# Altium PCB ESP_12F_CLOCK_MAXTRIX_V1.PcbDoc
Units mm, origin at the board's own origin, x right, y up, seen from the top; angles counter-clockwise.
Board outline 28 x 42 mm, 2 copper layers (Top Layer, Bottom Layer); 18 components, 22 nets, 94 pads, 6 vias.
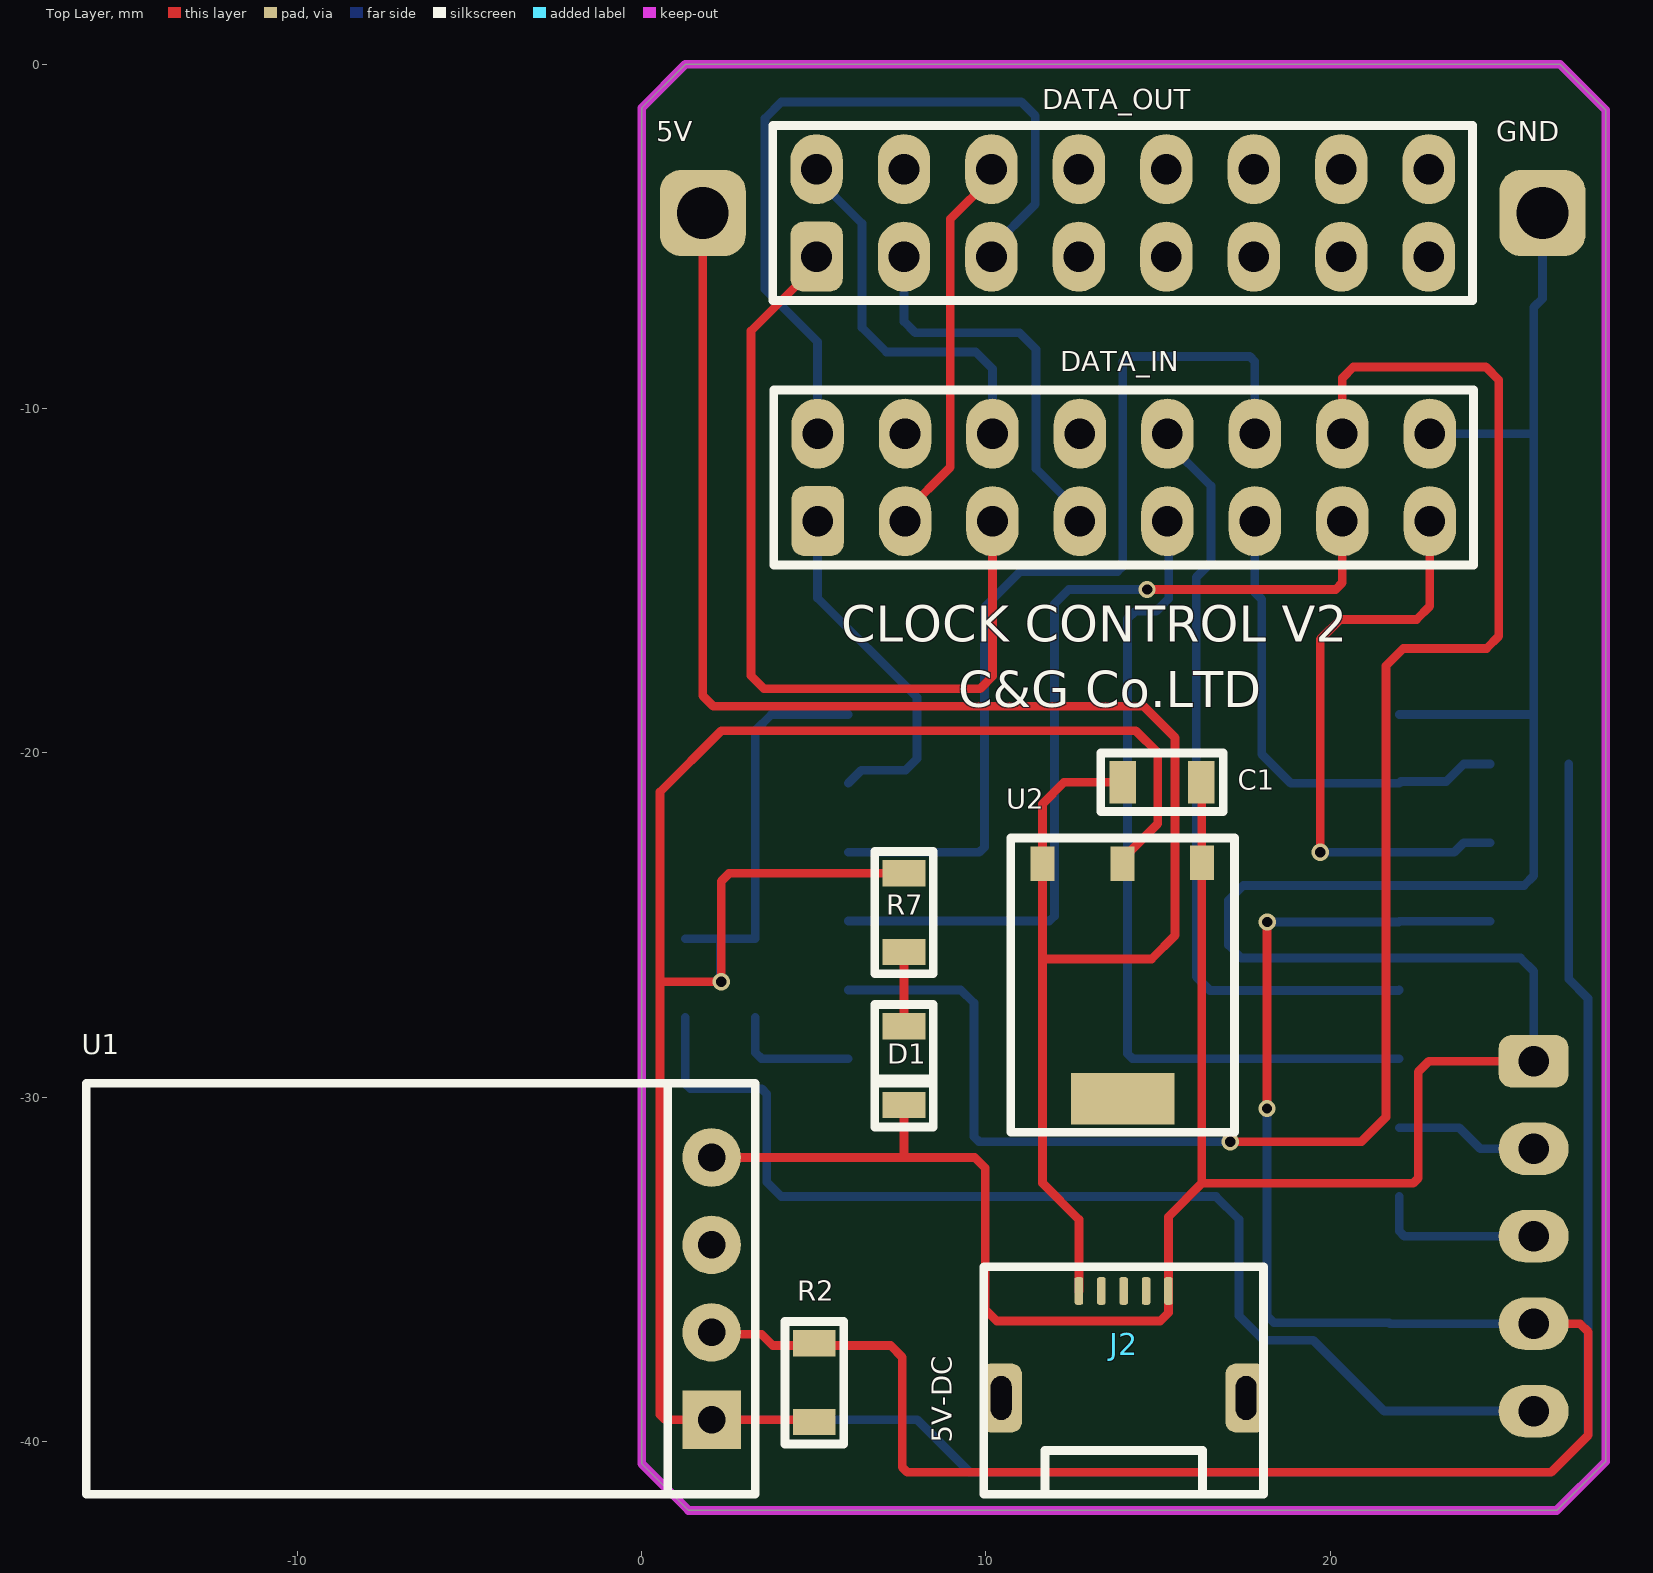
[diagram p0: Top Layer view]
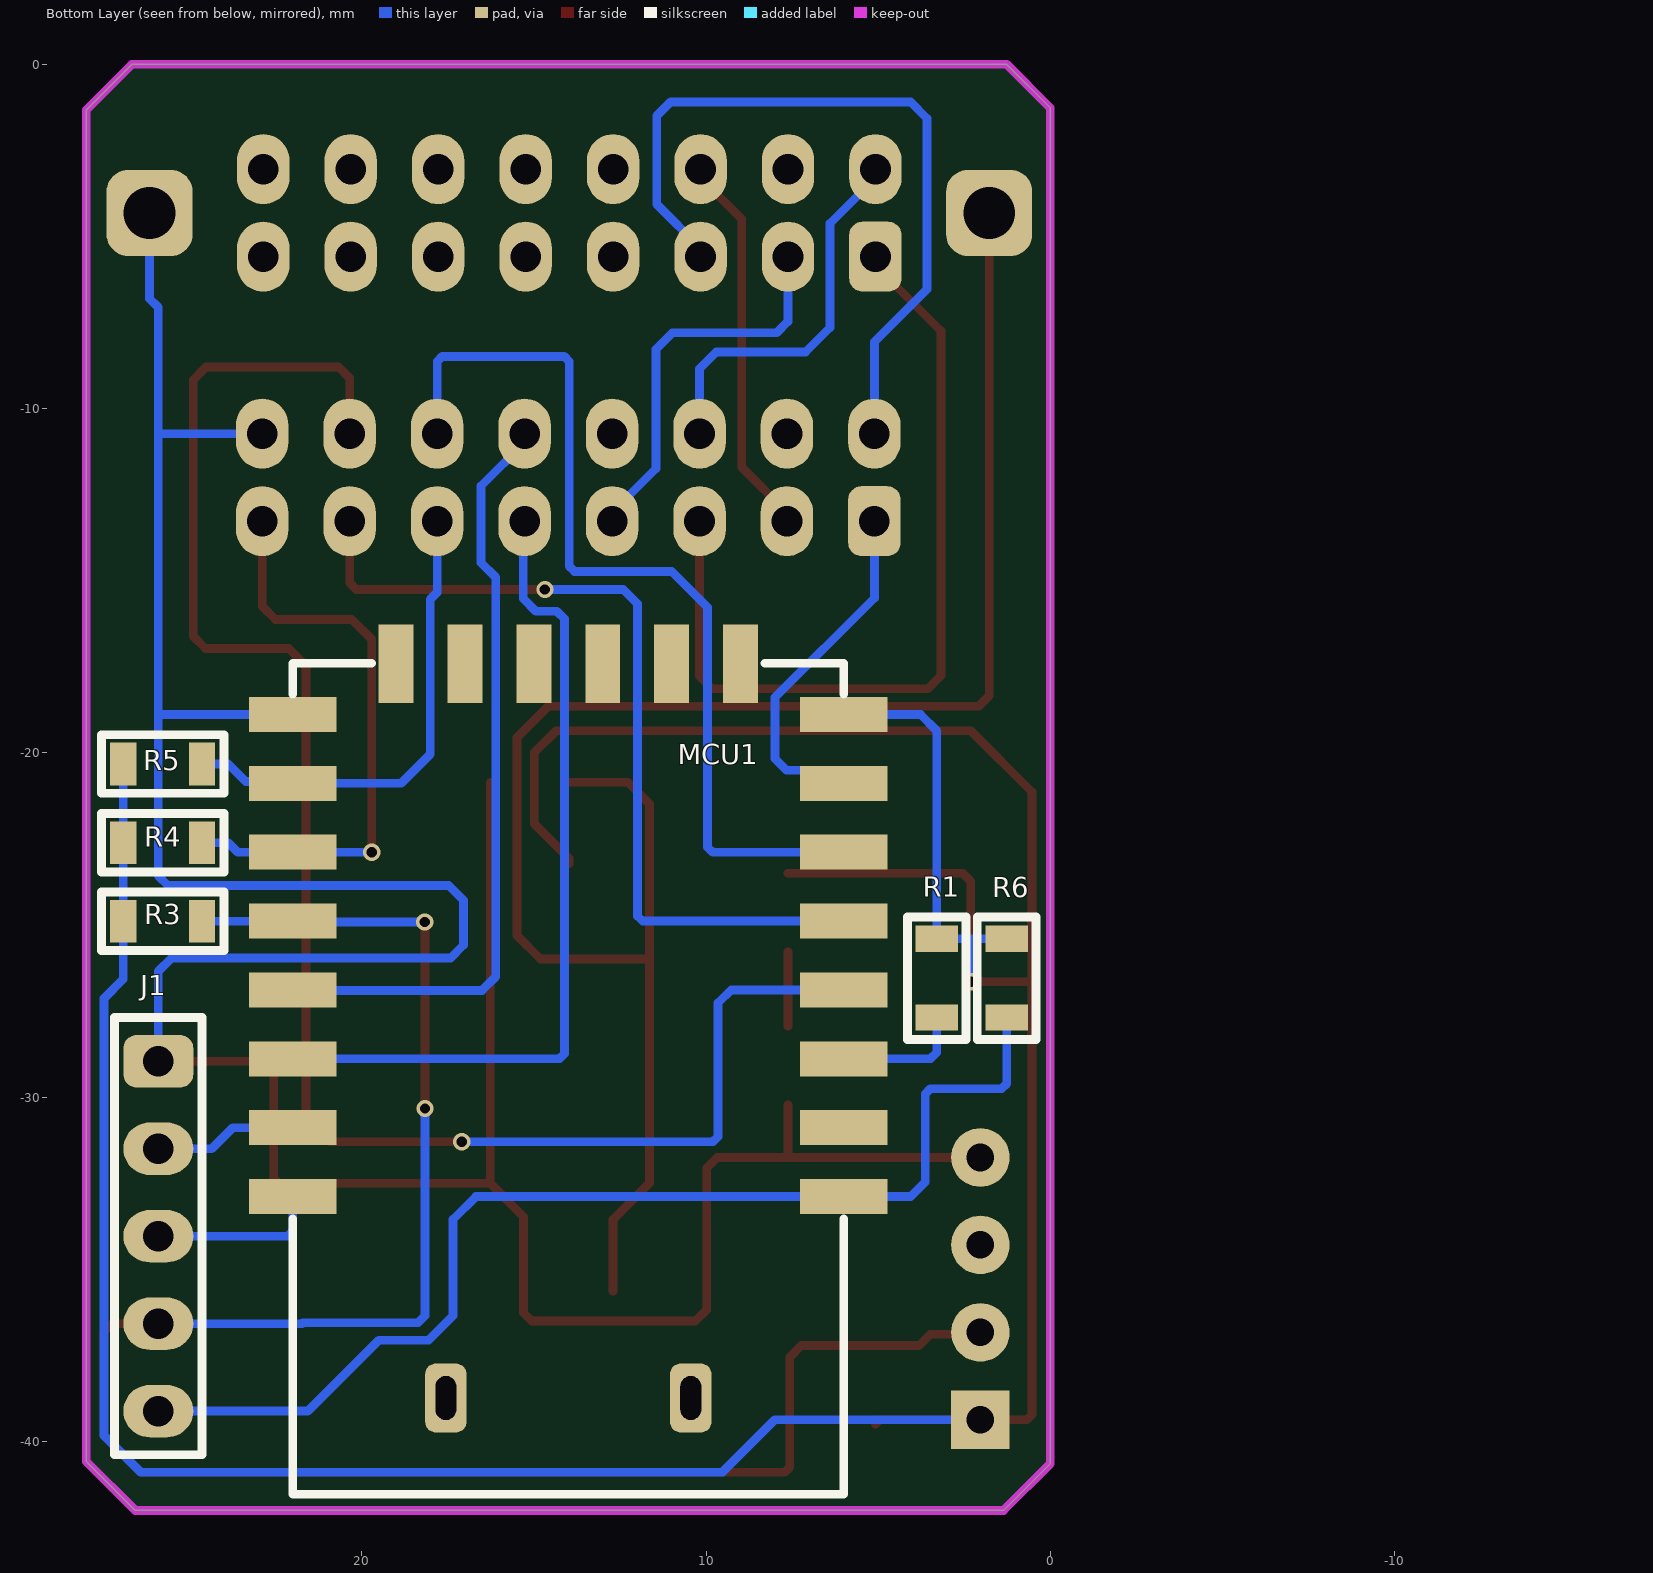
[diagram p1: Bottom Layer view, seen from below]

## Layer stack, top to bottom
Top Solder: solder mask 0.0102, Solder Resist, Dk 3.5
Top Layer: signal copper 0.0356
Dielectric 1: dielectric 0.32, FR-4, Dk 4.8
Bottom Layer: signal copper 0.0356
Bottom Solder: solder mask 0.0102, Solder Resist, Dk 3.5

## Board outline
0,-40.64 0,-1.27 1.27,0 26.67,0 28,-1.33 28,-40.58 26.58,-42 1.36,-42

## Design rules (kind name [scope] priority, off if disabled: settings)
Clearance [All] p1: gap=0.254 ignorepadtopadclearanceinfootprint=FALSE except(0: Arc-Hole Track-Hole SMDPad-Hole THPad-Hole Via-Hole Fill-Hole Poly-Hole Region-Hole Text-Hole)
PolygonConnect [All] p1: connectstyle=Relief reliefconductorwidth=0.254 reliefentries=4 polygonreliefangle="90 Angle" airgapwidth=0.254
RoutingVias [All] p1: holewidth=0.3 width=0.5 viastyle="Through Hole" minholewidth=0.3 minwidth=0.5 maxholewidth=0.3 maxwidth=0.5
SolderMaskExpansion [All] p1: expansion=0.102 istentingtop=FALSE
Width [All] p1: maxlimit=0.254 minlimit=0.254 preferedwidth=0.254
30 further rules are at their usual default settings.

## Components (designator, comment, footprint, x,y, rotation, side; value= is the part's Value field where it differs from the comment)
5V "SolderPoint" SolderPoint 1.778,-4.318 r0 top
C1 "103" C0805 15.113,-20.853 r180 top
D1 "LED0805" L0805RED 7.62,-29.083 r270 top
DATA_IN "DATA_IN" "Header 8x2 TH Pitch 2.54mm" 14,-12 r90 top
DATA_OUT "DATA_OUT" "Header 8x2 TH Pitch 2.54mm" 13.97,-4.318 r90 top
GND "SolderPoint" SolderPoint 26.162,-4.318 r0 top
J1 "PRGM" "Header 5x1 TH Pitch 2.54mm" 25.908,-34.036 r180 bottom
J2 "5V-DC" "Micro USB 01" 14,-38.862 r0 top
MCU1 "Wifi SoC ESP8266" ESP-12F 14,-25.146 r0 bottom
R1 "1K" R0805 3.302,-26.543 r270 bottom
R2 "10k" R0805 5.016,-38.291 r270 top
R3 "1K" R0805 25.781,-24.892 r0 bottom
R4 "1K" R0805 25.781,-22.606 r0 bottom
R5 "1K" R0805 25.781,-20.32 r0 bottom
R6 "1K" R0805 1.27,-26.543 r270 bottom
R7 "1K" R0805 7.62,-24.638 r90 top
U1 "DHT-11" DHT-11 2.032,-35.56 r90 top
U2 "AMS1117" SOT223-3 13.97,-26.67 r180 top

## Footprints (in the part's own frame and the unit in brackets; to place one, negate y for a bottom-side part, rotate by r counter-clockwise, add the part's x,y. Pads: shape width x height; smd on the part's side, far side on the other; paste and mask are expansions set on the pad)
C0805 [mil]
  rect 30x48.82 smd: 1(-45,0) 2(45,0)
  silkscreen extent -70,-33 70,33, body extent -39,-24 39,24, height 39
DHT-11 [mm]
  rect 1.7x1.7 hole 0.8: 1(-3.81,0)
  round 1.7 hole 0.8: 2(-1.27,0) 3(1.27,0) 4(3.81,0)
  silkscreen extent -5.97,-1.27 5.97,18.16, body extent -6,-0.35 6,18.15, height 5.5
ESP-12F [mil]
  rect 100x40 smd: 1(-314.96,304.65) 2(-314.96,225.91) 3(-314.96,147.17) 4(-314.96,68.43) 5(-314.96,-10.32) 6(-314.96,-89.06) 7(-314.96,-167.8) 8(-314.96,-246.54) 15(314.96,-246.54) 16(314.96,-167.8) 17(314.96,-89.06) 18(314.96,-10.32) 19(314.96,68.43) 20(314.96,147.17) 21(314.96,225.91) 22(314.96,304.65)
  rect 40x90 smd: 9(-196.85,-304.65) 10(-118.11,-304.65) 11(-39.37,-304.65) 12(39.37,-304.65) 13(118.11,-304.65) 14(196.85,-304.65)
  silkscreen extent -315,-305 315,645, body extent -315,-305 315,640, height 114
"Header 5x1 TH Pitch 2.54mm" [mil]
  rrect50% 80x60 hole 35: 1(0,200)
  oval 80x60 hole 35: 2(0,100) 3(0,0) 4(0,-100) 5(0,-200)
  silkscreen extent -50,-250 50,250, body extent -50,-250 50,250, height 350
"Header 8x2 TH Pitch 2.54mm" [mil]
  rrect50% 80x60 hole 35: 1(-50,350)
  oval 80x60 hole 35: 2(50,350) 3(-50,250) 4(50,250) 5(-50,150) 6(50,150) 7(-50,50) 8(50,50) 9(-50,-50) 10(50,-50) 11(-50,-150) 12(50,-150) 13(-50,-250) 14(50,-250) 15(-50,-350) 16(50,-350)
  silkscreen extent -100,-400 100,400, body extent -100,-400 100,400, height 350
L0805RED [mil]
  rect 30x48.82 smd: 1(-45,0) 2(45,0)
  silkscreen extent -70,-35 70,35, body extent -39,-25 39,25, height 43
"Micro USB 01" [mm]
  rrect50% 0.25x0.8 smd: 1(-1.3,3.235) 2(-0.65,3.235) 3(0,3.235) 4(0.65,3.235) 5(1.3,3.235)
  rrect50% 1.2x2 hole 0.6 slot 1.27 at 90 deg: 6(-3.556,0.127) 7(3.556,0.127)
  silkscreen extent -4.06,-2.67 4.06,3.94, body extent -4,-2.68 4,3.37, height 2.68
R0805 [mil]
  rect 30x48.82 smd: 1(-45,0) 2(45,0)
  silkscreen extent -70,-33 70,33, body extent -39,-25 40,25, height 18
SolderPoint [mm]
  rrect50% 2.5x2.5 hole 1.5: 1(0,0)
SOT223-3 [mm]
  rect 0.7x1 smd: 1(-2.3,-3.475) 2(0,-3.45) 3(2.325,-3.45)
  rect 3x1.5 smd: 4(0,3.375)
  silkscreen extent -3.25,-4.2 3.25,4.35, body extent -3.25,-3.5 3.25,3.5, height 1.7

## Part data
C1: library part C0805
DATA_IN DATA_OUT: library part "Header 8x2 TH Pitch 2.54mm"
J1: library part "Header 5x1 TH Pitch 2.54mm"
J2: library part "Micro USB (AB 2.0)"
MCU1: library part ESP-12F
R1 R2 R3 R4 R5 R6 R7: library part "Resistor SMD"
U2: library part AMS1117(SOT-223)

## Via types
v1: diameter 0.5, hole 0.3, Top Layer to Bottom Layer, tented both sides, 6 vias

## Nets (pads, with @x,y where several pads share a name; then routed paths per layer and width w, separated by ;. In a path a pad name is that pad's centre, name@x,y a point inside that pad or via, vN(x,y) a via of type N, cw(c..) or ccw(c..) an arc to the next point about the centre after c; other vN are vias at no path point)
3.3V: MCU1.8 R1.1 R2.2 R3.2 R4.2 R5.2 R6.1 R7.2 U1.1 U2.2 | length 110.4
  Top Layer w0.254: R2.2@5.08,-39.497 R2.2 4.953,-39.37 U1.1 0.686,-39.37 0.533,-39.218 0.533,-26.645 ; R7.2 2.54,-23.495 2.311,-23.724 v1(2.311,-26.645) 0.533,-26.645 ; U2.2 13.97,-23.07 14.986,-22.054 14.986,-19.99 14.351,-19.355 2.311,-19.355 0.533,-21.133 0.533,-26.645
  Bottom Layer w0.254: R6.1 2.286,-25.4 ; U1.1 8.001,-39.37 9.525,-40.894 26.416,-40.894 27.483,-39.827 27.483,-27.127 26.924,-26.568 R3.2 R4.2 R5.2 ; v1(2.311,-26.645) 2.286,-26.619 2.286,-25.4 ; MCU1.8 3.773,-18.884 3.302,-19.355 R1.1 2.286,-25.4
GND: C1.1 D1.2 DATA_IN.16 GND.1 J1.1 J2.5 MCU1.15 U1.4 U2.1 | length 96.5
  Top Layer w0.254: U1.4 7.62,-31.75 ; D1.2 7.62,-31.75 ; C1.1 16.27,-20.867 U2.1 16.27,-32.498 ; J1.1 22.86,-28.956 22.555,-29.261 22.555,-32.349 22.406,-32.498 16.27,-32.498 ; 7.62,-31.75 9.677,-31.75 9.982,-32.055 9.982,-36.17 10.312,-36.5 15.062,-36.5 15.3,-36.262 J2.5 15.3,-33.468 16.27,-32.498
  Bottom Layer w0.254: MCU1.15 25.908,-18.884 ; DATA_IN.16 25.908,-10.73 ; J1.1 25.908,-26.34 25.527,-25.959 17.424,-25.959 17.043,-25.578 17.043,-24.282 17.475,-23.851 25.629,-23.851 25.908,-23.571 25.908,-18.884 ; GND.1 26.162,-6.807 25.908,-7.061 25.908,-10.73 ; 25.908,-18.884 25.908,-10.73
Net5V_1: 5V.1 C1.2 J2.1 U2.3 | length 55.3
  Top Layer w0.254: 5V.1 1.778,-18.339 2.083,-18.644 14.58,-18.644 15.494,-19.558 15.494,-25.298 14.808,-25.984 11.645,-25.984 ; J2.1 12.7,-33.553 11.645,-32.498 11.645,-25.984 ; C1.2 12.268,-20.853 11.645,-21.477 U2.3 11.645,-25.984
NetD1_1: D1.1 R7.1 | length 2.2
  Top Layer w0.254: D1.1 R7.1
NetDATA_IN_1: DATA_IN.1 MCU1.7 | length 10.4
  Bottom Layer w0.254: DATA_IN.1 5.11,-15.499 8.001,-18.39 8.001,-20.165 7.663,-20.503 6.381,-20.503 MCU1.7
NetDATA_IN_2: DATA_IN.2 DATA_OUT.5 | length 22.9
  Top Layer w0.254: DATA_OUT.5 DATA_OUT.5@10.16,-5.334
  Bottom Layer w0.254: DATA_IN.2 5.11,-8.059 3.581,-6.53 3.581,-1.575 4.064,-1.092 11.024,-1.092 11.43,-1.499 11.43,-4.064 10.16,-5.334 DATA_OUT.5
NetDATA_IN_3: DATA_IN.3 DATA_OUT.6 | length 11.3
  Top Layer w0.254: DATA_IN.3 7.65,-13.016 8.966,-11.7 8.966,-4.496 10.16,-3.302 DATA_OUT.6
NetDATA_IN_5: DATA_IN.5 DATA_OUT.1 | length 24.8
  Top Layer w0.254: DATA_OUT.1 5.08,-5.842 3.175,-7.747 3.175,-17.755 3.556,-18.136 9.83,-18.136 10.19,-17.775 DATA_IN.5
NetDATA_IN_6: DATA_IN.6 DATA_OUT.2 | length 11.3
  Bottom Layer w0.254: DATA_OUT.2 5.08,-3.302 6.401,-4.623 6.401,-7.645 7.112,-8.357 9.703,-8.357 10.19,-8.844 DATA_IN.6
NetDATA_IN_7: DATA_IN.7 DATA_OUT.3 | length 11.6
  Bottom Layer w0.254: DATA_OUT.3 7.62,-7.468 7.95,-7.798 10.973,-7.798 11.455,-8.28 11.455,-11.741 12.73,-13.016 DATA_IN.7
NetDATA_IN_9: DATA_IN.9 MCU1.20 | length 24.3
  Bottom Layer w0.254: DATA_IN.9 15.312,-13.312 15.312,-15.514 14.943,-15.884 14.334,-15.884 14.111,-16.107 14.111,-28.735 14.26,-28.884 MCU1.20
NetDATA_IN_10: DATA_IN.10 MCU1.19 | length 22.5
  Bottom Layer w0.254: DATA_IN.10 15.27,-10.984 16.535,-12.249 16.535,-14.478 16.111,-14.902 16.111,-26.5 16.51,-26.899 21.985,-26.899 MCU1.19
NetDATA_IN_11: DATA_IN.11 MCU1.16 R5.1 | length 14.1
  Bottom Layer w0.254: DATA_IN.11 17.81,-15.338 18.009,-15.537 18.009,-20.041 18.852,-20.884 MCU1.16 22.056,-20.828 23.368,-20.828 23.876,-20.32 R5.1
NetDATA_IN_12: DATA_IN.12 MCU1.6 | length 27.5
  Bottom Layer w0.254: MCU1.6 9.808,-22.884 9.957,-22.735 9.957,-15.773 10.998,-14.732 13.818,-14.732 13.97,-14.58 13.97,-8.632 14.119,-8.484 17.661,-8.484 17.81,-8.632 DATA_IN.12
NetDATA_IN_13: DATA_IN.13 MCU1.5 | length 25.5
  Top Layer w0.254: v1(14.681,-15.253) 20.155,-15.253 20.35,-15.058 DATA_IN.13
  Bottom Layer w0.254: MCU1.5 11.84,-24.884 11.989,-24.735 11.989,-15.672 12.408,-15.253 v1(14.681,-15.253)
NetDATA_IN_14: DATA_IN.14 MCU1.4 | length 50.6
  Top Layer w0.254: v1(17.094,-31.293) 20.904,-31.293 21.615,-30.582 21.615,-17.475 22.123,-16.967 24.536,-16.967 24.892,-16.612 24.892,-9.169 24.511,-8.788 20.676,-8.788 20.35,-9.114 DATA_IN.14
  Bottom Layer w0.254: MCU1.4 9.271,-26.884 9.652,-27.265 9.652,-31.144 9.801,-31.293 v1(17.094,-31.293)
NetDATA_IN_15: DATA_IN.15 MCU1.17 R4.1 | length 17.3
  Top Layer w0.254: v1(19.71,-22.885) 19.71,-16.703 20.29,-16.124 22.504,-16.124 22.89,-15.739 DATA_IN.15
  Bottom Layer w0.254: v1(19.71,-22.885) MCU1.17 MCU1.17 23.598,-22.884 23.876,-22.606 R4.1
NetJ1_2: J1.2 MCU1.21 | length 4.2
  Bottom Layer w0.254: MCU1.21 23.747,-30.884 24.359,-31.496 J1.2
NetJ1_3: J1.3 MCU1.22 | length 5
  Bottom Layer w0.254: MCU1.22 22,-33.887 22.149,-34.036 J1.3
NetJ1_4: J1.4 MCU1.18 R2.1 R3.1 U1.2 | length 60
  Top Layer w0.254: U1.2 2.083,-36.881 3.48,-36.881 3.81,-37.211 5.016,-37.211 7.232,-37.211 7.569,-37.548 7.569,-40.745 7.718,-40.894 26.416,-40.894 27.492,-39.818 27.492,-36.814 27.254,-36.576 J1.4 ; v1(18.161,-30.328) 18.161,-24.968 18.237,-24.892 18.19,-24.892 v1(18.173,-24.909)
  Bottom Layer w0.254: v1(18.161,-30.328) 18.161,-36.347 18.364,-36.551 21.703,-36.551 21.729,-36.576 J1.4 ; v1(18.173,-24.909) 21.991,-24.909 22.008,-24.892 R3.1
NetJ1_5: J1.5 MCU1.1 R6.2 | length 33.6
  Bottom Layer w0.254: R6.2 1.27,-29.607 1.419,-29.756 3.485,-29.756 3.634,-29.905 3.634,-32.463 4.055,-32.884 MCU1.1 16.679,-32.884 17.348,-33.553 17.348,-36.347 18.059,-37.059 19.507,-37.059 21.565,-39.116 J1.5
NetMCU1_3: MCU1.3 R1.2 | length 3.8
  Bottom Layer w0.254: R1.2 3.302,-28.702 3.484,-28.884 MCU1.3
pads on no net: DATA_IN.4 DATA_IN.8 DATA_OUT.4 DATA_OUT.7 DATA_OUT.8 DATA_OUT.9 DATA_OUT.10 DATA_OUT.11 DATA_OUT.12 DATA_OUT.13 DATA_OUT.14 DATA_OUT.15 DATA_OUT.16 J2.2 J2.3 J2.4 J2.6 J2.7 MCU1.2 MCU1.9 MCU1.10 MCU1.11 MCU1.12 MCU1.13 MCU1.14 U1.3 U2.4

## Keep-outs
Keep-Out Layer:
  the board outline again, w0.254

## Silkscreen, mask and mechanical layers (free items; w line width, h text height)
Top Overlay:
  text "CLOCK CONTROL V2" at 5.8,-17.123 h1.8
  text "C&G Co.LTD" at 9.2,-19.02 h1.8